# EAGLE board mapleCUx_large_177 (EAGLE 7.3.0)
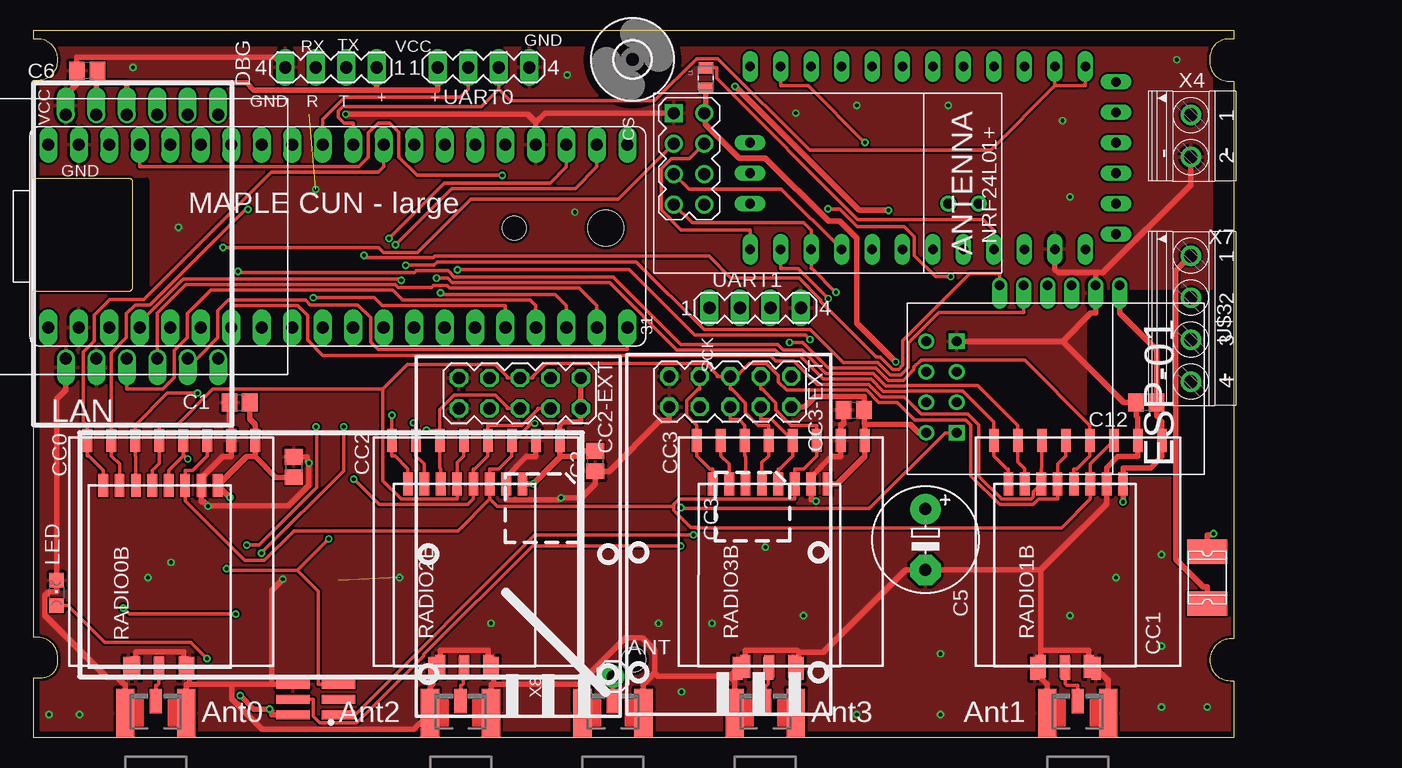
[diagram p0: board, top side]
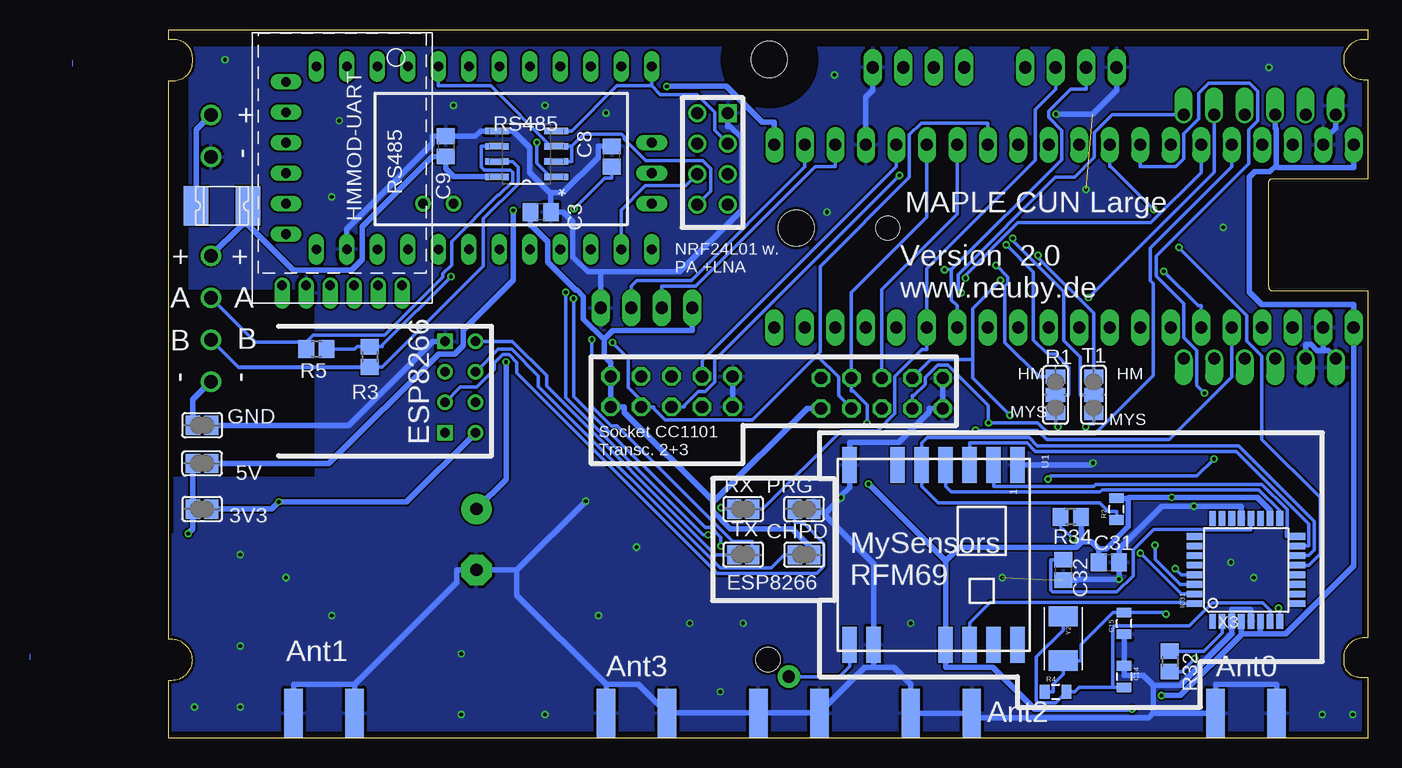
[diagram p1: board, bottom side, seen from below]

Size 100 x 59 mm. Coordinates in mm from the lower left corner, seen from the top.
Outline: 0,0 0,5 0.71,5 arc90 2,6.29 2,6.67 arc90 0.32,8.35 0,8.35 0,37.21 7.89,37.21 arc90 8.26,37.58 8.26,46.32 arc90 7.97,46.61 0,46.61 0,54.83 0.39,54.83 arc90 2,56.44 2,56.57 arc90 0.33,58.24 0,58.24 0,59 100,59 100,58.24 99.54,58.24 arc90 98,56.7 98,56.41 arc90 99.41,54.75 100,54.75 100,8.24 99.8,8.24 arc90 98,6.44 arc90 99.69,4.75 100,4.75 100,0 0,0
Copper layers (1*16): Top 0.035mm / dielectric 1.5mm / Bottom 0.035mm
Design rules "SeeedStudio_2layer_DRU_no_angle_20140221": minimum track width 6mil, minimum drill 12mil, track to track 6mil, track to pad 6mil, pad to pad 6mil, via to via 6mil, smd to smd 0mil, copper to edge 10mil, drill to drill 10mil, minimum pad ring 10mil, minimum via ring 6mil, stop-mask expansion 2mil, vias tented up to drill 100mil, thermal gap 10mil
Net classes: 0 default: width 0.305 mm; 1 PWR: width 0.457 mm
Holes 2 mm at 50,6.5 40.03,42.48
Holes 3 mm at 47.65,42.48
tRestrict: area 0,37.3 to 9.4,46.5; area 1.9,17.1 to 100.3,59.1
bRestrict: area 0,37.3 to 9.4,46.5; area 1.9,17.1 to 100.3,59.1

## Footprints (pad centres in the part's own frame; a part is rotated, then mirrored left to right if it is on the bottom)
SJ = smd 1.168 x 1.6: 1 -0.762,0; 2 0.762,0
1X01 = drill 1.016 pad 1.88: 1 0,0
C0805 = smd 1.3 x 1.5: 1 -0.85,0; 2 0.85,0
E5-8,5 = drill 1.016 pad 2.54: + -2.54,0 | drill 1.016 pad 2.54 octagon: - 2.54,0
0805 = smd 0.8 x 1.2: 1 -0.9,0; 2 0.9,0
CC1101_MODULE1_SMD = smd 1.93 x 0.813: ANT 19,5.96; CSN 0,0; GDO0 0,2; GDO2 0,4; GND@0 0,12; GND@1 19,8.5; GND@2 19,3.42; MISO 0,6; MOSI 0,10; SCLK 0,8; VCC 0,14
CC1101_MODULE3_DIL = drill 1.016 octagon: CSN 1.81,6.1; GDO0 4.35,6.1; GDO2 4.35,8.64; GND@0 1.81,3.56; GND@1 4.35,3.56; MISO 1.81,8.64; MOSI 1.81,11.18; SCK 4.35,11.18; VCC@0 1.81,13.72; VCC@1 4.35,13.72
MA04-1 = drill 1.016 long: 1 -3.81,0; 2 -1.27,0; 3 1.27,0; 4 3.81,0
1812L = smd 2.03 x 3.3: P$1 -2.16,0; P$2 2.16,0
3,0 = hole 3: 0,0
HM-MOD-UART-DIL = drill 0.8 offset: 1 0,12; 2 0,10; 3 0,8; 4 0,6; 5 0,4; 6 0,2
USR-ES1 = drill 1 pad 1.35 offset: 1 -10.16,5.715; 2 -10.16,3.175; 3 -10.16,0.635; 4 -10.16,-1.905; 5 -10.16,-4.445; 6 -10.16,-6.985; 7 10.16,-6.985; 8 10.16,-4.445; 9 10.16,-1.905; 10 10.16,0.635; 11 10.16,3.175; 12 10.16,5.715
TQFP32-08 = smd 1.27 x 0.559: 1 -4.293,2.8; 2 -4.293,2; 3 -4.293,1.2; 4 -4.293,0.4; 5 -4.293,-0.4; 6 -4.293,-1.2; 7 -4.293,-2; 8 -4.293,-2.8; 17 4.293,-2.8; 18 4.293,-2; 19 4.293,-1.2; 20 4.293,-0.4; 21 4.293,0.4; 22 4.293,1.2; 23 4.293,2; 24 4.293,2.8 | smd 0.559 x 1.27: 9 -2.8,-4.293; 10 -2,-4.293; 11 -1.2,-4.293; 12 -0.4,-4.293; 13 0.4,-4.293; 14 1.2,-4.293; 15 2,-4.293; 16 2.8,-4.293; 25 2.8,4.293; 26 2,4.293; 27 1.2,4.293; 28 0.4,4.293; 29 -0.4,4.293; 30 -1.2,4.293; 31 -2,4.293; 32 -2.8,4.293
WE-KI_0805A = smd 0.925 x 1.2: 1 -0.838,0; 2 0.838,0
CHIPLED_0805 = smd 1.2 x 1.2: A 0,-1.05; C 0,1.05
WIRELESS-NRF24L01 = drill 1 square: 1 -12.7,6.35 | drill 1: 2 -10.16,6.35; 3 -12.7,3.81; 4 -10.16,3.81; 5 -12.7,1.27; 6 -10.16,1.27; 7 -12.7,-1.27; 8 -10.16,-1.27
SJ_2 = smd 1.168 x 1.6: 1 -1.524,0; 2 0,0; 3 1.524,0
R0805 = smd 1.3 x 1.5: 1 -0.85,0; 2 0.85,0
CC1101_MODULE1_SMD' = smd 1.93 x 0.813: ANT 14.889,4.381; CSN -0.318,-0.318; GDO0 -0.318,1.048; GDO2 -0.318,2.413; GND@0 -0.318,7.872; GND@1 14.889,6.381; GND@2 14.889,2.381; MISO -0.318,3.777; MOSI -0.318,6.508; SCLK -0.318,5.143; VCC -0.318,9.238
SOIC127P600X175-8N = smd 1.981 x 0.533: 1 -2.464,1.905; 2 -2.464,0.635; 3 -2.464,-0.635; 4 -2.464,-1.905; 5 2.464,-1.905; 6 2.464,-0.635; 7 2.464,0.635; 8 2.464,1.905
RFM69HCW-XXXS2 = smd 3 x 1.2: 3.3V 7.5,1; ANT 7.5,-7; DIO0 7.5,3; DIO1 7.5,5; DIO2 7.5,7; GND_1 7.5,-5; GND_2 -7.5,-7; GND_3 -7.5,7; MISO -7.5,5; MOSI -7.5,3; NSS -7.5,-1; RESET -7.5,-3; SCK -7.5,1
20-DIP = drill 1.016 pad 1.27 long: 1 -24.13,-7.62; 2 -21.59,-7.62; 3 -19.05,-7.62; 4 -16.51,-7.62; 5 -13.97,-7.62; 6 -11.43,-7.62; 7 -8.89,-7.62; 8 -6.35,-7.62; 9 -3.81,-7.62; 10 -1.27,-7.62; 11 1.27,-7.62; 12 3.81,-7.62; 13 6.35,-7.62; 14 8.89,-7.62; 15 11.43,-7.62; 16 13.97,-7.62; 17 16.51,-7.62; 18 19.05,-7.62; 19 21.59,-7.62; 20 24.13,-7.62 | drill 1 pad 1.27 long: 21 24.13,7.62; 22 21.59,7.62; 23 19.05,7.62; 24 16.51,7.62; 25 13.97,7.62; 26 11.43,7.62; 27 8.89,7.62; 28 6.35,7.62; 29 3.81,7.62; 30 1.27,7.62; 31 -1.27,7.62; 32 -3.81,7.62; 33 -6.35,7.62; 34 -8.89,7.62; 35 -11.43,7.62; 36 -13.97,7.62; 37 -16.51,7.62; 38 -19.05,7.62; 39 -21.59,7.62; 40 -24.13,7.62
ABK-PRO-MINI = drill 0.8 long: A0 10.16,-3.81; A1 10.16,-6.35; A2 10.16,-8.89; A3 10.16,-11.43; A6 3.81,-21.59; A7 6.35,-21.59; D2 -5.08,-3.81; D3 -5.08,-6.35; D4 -5.08,-8.89; D5 -5.08,-11.43; D6 -5.08,-13.97; D7 -5.08,-16.51; D8 -5.08,-19.05; D9 -5.08,-21.59; D10 10.16,-21.59; D11 10.16,-19.05; D12 10.16,-16.51; D13 10.16,-13.97; DTR 8.89,8.89; GND 10.16,3.81; GND1 -5.08,-1.27; GND2 -3.81,8.89; GND3 -1.27,8.89; GND4 1.27,-21.59; RAW 10.16,6.35; RST 10.16,1.27; RST1 -5.08,1.27; RX1 -5.08,3.81; RX1-1 3.81,8.89; TX0 -5.08,6.35; TX0-1 6.35,8.89; VCC 10.16,-1.27; VCC1 1.27,8.89 | drill 0.8: A4 6.35,-5.08; A5 6.35,-2.54
ESP01 = drill 0.8: CH_PD -1.285,-8.178; GPIO0 1.255,-5.638; GPIO2 -1.285,-5.638; RST 1.255,-8.178; TX -3.825,-8.178; VCC 3.795,-8.178 | drill 0.8 square: GND -3.825,-5.638; RX 3.795,-5.638
SMA_EDGELAUNCH_UFL = smd 4.064 x 1.524: GND@1 2.032,-2.54; GND@2 2.032,2.54 | smd 4.064 x 1.524 bottom: GND@3 2.032,2.54; GND@4 2.032,-2.54 | smd 2.032 x 1.016: P 3.048,0
1751248 = drill 1.1 pad 1.7: 1 -1.75,-0.1; 2 1.75,-0.1
1751264 = drill 1.1 pad 1.7: 1 -5.25,-0.1; 2 -1.75,-0.1; 3 1.75,-0.1; 4 5.25,-0.1
2X03-1.27MM_SMD = smd 0.75 x 2.8: P$1 -1.27,-1.905; P$2 -1.27,1.905; P$3 0,-1.905; P$4 0,1.905; P$5 1.27,-1.905; P$6 1.27,1.905
CRYSTAL-TXC-7A = smd 1.7 x 2.4: P$1 1.85,0; P$2 -1.85,0

## Placement (x,y rotation side)
3V3  [SJ]  97.16,19.05 180 bottom
5V  [SJ]  97.16,22.86 0 bottom
ANT  MICRO RF  [1X01]  48.26,5.08 0 top
C1  22pF  [C0805]  17.14,27.94 0 top
C2  22pF  [C0805]  46.81,23.05 90 top
C3  22pF  [C0805]  68.94,43.81 180 bottom
C4  22pF  [C0805]  68.33,27.3 0 top
C5  220uF  [E5-8,5]  74.3,16.51 270 top
C6  22pF  [C0805]  4.45,55.61 180 top
C8  220p  [C0805]  63.03,48.45 90 bottom
C9  22p  [C0805]  76.83,49.3 270 bottom
C11  22pF  [C0805]  21.66,22.55 270 top
C12  22pF  [C0805]  92.71,27.94 180 top
C14  30pf  [0805]  20.32,5.08 270 bottom
C15  30pf  [0805]  20.32,9.53 90 bottom
C31  100n  [C0805]  21.59,14.61 0 bottom
C32  100n  [C0805]  25.4,13.97 270 bottom
CC0  CC1101  [CC1101_MODULE1_SMD]  4.45,24.77 270 top
CC1  CC1101_MODULE1SMD  [CC1101_MODULE1_SMD]  80.01,24.77 270 top
CC2  CC1101_MODULE1SMD  [CC1101_MODULE1_SMD]  29.84,24.77 270 top
CC2-EXT  CC1101_MODULE3_DIL  [CC1101_MODULE3_DIL]  31.87,31.79 270 top
CC3  CC1101_MODULE1SMD  [CC1101_MODULE1_SMD]  55.24,24.77 270 top
CC3-EXT  CC1101_MODULE3_DIL  [CC1101_MODULE3_DIL]  49.4,31.93 270 top
CHPD  [SJ]  46.99,15.24 180 bottom
DBG  [MA04-1]  24.77,55.88 180 top
F1  1812L  [1812L]  95.5,44.32 180 bottom
F2  1812L  [1812L]  97.79,13.34 270 top
GND  [SJ]  97.16,26.04 180 bottom
H6  MOUNT-HOLE3.0  [3,0]  49.89,56.55 0 top
HMMOD-UART  HM-MOD-UARTDIL  [HM-MOD-UART-DIL]  78.49,37.72 90 bottom
IC2  LAN-USR-ES1  [USR-ES1]  8.38,41.78 90 top
IC31  ATMEGA168-TQFP  [TQFP32-08]  10.16,13.97 90 bottom
L1  [WE-KI_0805A]  56,55 270 top
LED  [CHIPLED_0805]  1.91,12.06 0 top
NRF24L01+  NRF24L01+  [WIRELESS-NRF24L01]  66.04,45.72 0 top
PRG  [SJ]  46.99,19.05 0 bottom
R1  [SJ_2]  26.04,28.57 90 bottom
R2  10k  [0805]  20.95,19.05 90 bottom
R3  60  [R0805]  83.19,31.75 270 bottom
R4  1M  [0805]  26.04,3.81 0 bottom
R5  60  [R0805]  87.63,32.38 180 bottom
R32  1k  [R0805]  16.51,6.35 270 bottom
R34  [R0805]  24.77,18.41 180 bottom
RADIO0B  CC1101_MODULE1SMALL  [CC1101_MODULE1_SMD']  6.1,20.7 270 top
RADIO1B  CC1101_MODULE1SMALL  [CC1101_MODULE1_SMD']  81.53,20.83 270 top
RADIO2B  CC1101_MODULE1SMALL  [CC1101_MODULE1_SMD']  31.5,20.83 270 top
RADIO3B  CC1101_MODULE1SMALL  [CC1101_MODULE1_SMD']  56.9,20.83 270 top
RS485  MAX487ECSA+  [SOIC127P600X175-8N]  70.12,48.66 180 bottom
RX  [SJ]  52.07,19.05 180 bottom
T1  [SJ_2]  22.86,28.57 90 bottom
TX  [SJ]  52.07,15.24 180 bottom
U1  RFM69HCW  [RFM69HCW-XXXS2]  36.2,15.24 270 bottom
U$1  MAPLEMINI  [20-DIP]  25.34,41.8 0 top
U$2  ABK-PRO-MINI  [ABK-PRO-MINI]  81.28,50.87 270 top
U$3  ESP01  [ESP01]  82.55,29.21 270 top
UART0  [MA04-1]  37.47,55.88 0 top
UART1  [MA04-1]  60.12,35.83 0 top
X1  [SMA_EDGELAUNCH_UFL]  87,0 90 top
X2  [SMA_EDGELAUNCH_UFL]  35.56,0 90 top
X3  [SMA_EDGELAUNCH_UFL]  60.96,0 90 top
X4  1751248  [1751248]  96.52,50.16 270 top
X5  [SMA_EDGELAUNCH_UFL]  10.16,0 90 top
X7  1751264  [1751264]  96.52,34.92 270 top
X8  [SMA_EDGELAUNCH_UFL]  48.26,0 90 top
X31  M03X2  [2X03-1.27MM_SMD]  23.5,3.17 90 top
Y2  8MHZ  [CRYSTAL-TXC-7A]  25.4,8.26 270 bottom

## Library data of the parts
3V3 5V CHPD GND PRG R1 RX T1 TX = jumper
ANT = SparkFun-Connectors
C1-C6 C8 C9 C11 C12 C31 C32 R3 R5 R32 R34 = rcl
C14 C15 R2 R4 U1 = doug
CC0 CC1 CC2 CC2-EXT CC3 CC3-EXT HMMOD-UART = wireless
DBG UART0 UART1 = con-lstb; OC_FARNELL: unknown; OC_NEWARK: unknown
F1 F2 = ptc-littlefuse
H6 = holes
IC2 RADIO0B RADIO1B RADIO2B RADIO3B = Martin-Communication
IC31 = atmel
L1 = EAGLE-EMC_COMPONENTS-rev17a
LED = led
NRF24L01+ = diy-modules
RS485 = Maxim_By_element14_Batch_1; MPN: MAX487ECSA+; OC_FARNELL: 9724532; OC_NEWARK: 68K4803; PACKAGE: SOIC-8; SUPPLIER: Maxim
U$1 = maplemini-small
U$2 = Arduino-clone
U$3 = esp8266modules
X1-X3 X5 X8 = adafruit
X4 = con-phoenix-350; OC_FARNELL: unknown; OC_NEWARK: unknown
X7 = con-phoenix-350; MPN: 1751264; OC_FARNELL: unknown; OC_NEWARK: 10R0934
X31 = mechanics
Y2 = SparkFun-FreqCtrl

## Nets
+5V [PWR]: 5V.2 U$1.21
A: R5.2 RS485.6 X7.2
ANT: ANT.1 U1.ANT X8.P
ANT0: CC0.ANT RADIO0B.ANT X5.P
ANT1: CC1.ANT RADIO1B.ANT X1.P
ANT2: CC2.ANT RADIO2B.ANT X2.P
ANT3: CC3.ANT RADIO3B.ANT X3.P
B: R3.2 RS485.7 X7.3
CC_CS0: CC0.CSN RADIO0B.CSN U$1.29
CC_CS1: CC1.CSN RADIO1B.CSN U$1.35
CC_CS2: CC2-EXT.CSN CC2.CSN RADIO2B.CSN U$1.4
CC_CS3: CC3-EXT.CSN CC3.CSN RADIO3B.CSN U$1.25
CC_IN_0: CC0.GDO2 RADIO0B.GDO2 U$1.33
CC_IN_1: CC1.GDO2 RADIO1B.GDO2 U$1.7
CC_IN_2: CC2-EXT.GDO2 CC2.GDO2 RADIO2B.GDO2 U$1.5
CC_IN_3: CC3-EXT.GDO2 CC3.GDO2 RADIO3B.GDO2 U$1.37
CC_OUT_0: CC0.GDO0 RADIO0B.GDO0 U$1.32
CC_OUT_1: CC1.GDO0 RADIO1B.GDO0 U$1.6
CC_OUT_2: CC2-EXT.GDO0 CC2.GDO0 RADIO2B.GDO0 U$1.36
CC_OUT_3: CC3.GDO0 RADIO3B.GDO0
CE-A: IC31.13 NRF24L01+.3 RS485.4 U$2.D9
CSN-A: NRF24L01+.4 U$2.D10
D2_INT0: IC31.32 U1.DIO0
D10_SS: IC31.14 R2.1 U1.NSS
D11_MOSI: IC31.15 U1.MOSI
D12_MISO: IC31.16 U1.MISO
D13_SCK: IC31.17 U1.SCK
E+ [PWR]: F1.P$2 X4.1
GD [PWR]: GND.2 X7.4
GND [PWR]: C1.1 C2.1 C3.1 C4.1 C5.- C6.2 C8.2 C9.1 C11.1 C12.2 C14.1 C15.1 C31.2 C32.2 CC0.GND@0 CC0.GND@1 CC0.GND@2 CC1.GND@0 CC1.GND@1 CC1.GND@2 CC2-EXT.GND@0 CC2-EXT.GND@1 CC2.GND@0 CC2.GND@1 CC2.GND@2 CC3-EXT.GND@0 CC3-EXT.GND@1 CC3.GND@0 CC3.GND@1 CC3.GND@2 DBG.4 GND.1 HMMOD-UART.2 IC2.1 IC2.2 IC2.12 IC31.3 IC31.5 IC31.21 LED.C NRF24L01+.1 PRG.2 RADIO0B.GND@0 RADIO0B.GND@1 RADIO0B.GND@2 RADIO1B.GND@0 RADIO1B.GND@1 RADIO1B.GND@2 RADIO2B.GND@0 RADIO2B.GND@1 RADIO2B.GND@2 RADIO3B.GND@0 RADIO3B.GND@1 RADIO3B.GND@2 RS485.5 U1.GND_1 U1.GND_2 U1.GND_3 U$1.2 U$1.24 U$1.39 U$2.GND U$3.GND UART0.4 UART1.4 X1.GND@1 X1.GND@2 X1.GND@3 X1.GND@4 X2.GND@1 X2.GND@2 X2.GND@3 X2.GND@4 X3.GND@1 X3.GND@2 X3.GND@3 X3.GND@4 X4.2 X5.GND@1 X5.GND@2 X5.GND@3 X5.GND@4 X8.GND@1 X8.GND@2 X8.GND@3 X8.GND@4 X31.P$6
IRQ-A: NRF24L01+.8 RS485.2 RS485.3 U$2.D2
M-RES: IC31.29 R34.2 X31.P$5
M-SCK: X31.P$3
MISO1: CC0.MISO CC1.MISO CC2-EXT.MISO CC2.MISO CC3-EXT.MISO CC3.MISO RADIO0B.MISO RADIO1B.MISO RADIO2B.MISO RADIO3B.MISO U$1.27
MISO2: IC2.7 U$1.18
MISO-A: NRF24L01+.7 U$2.D12 X31.P$1
MOSI1: CC0.MOSI CC1.MOSI CC2-EXT.MOSI CC2.MOSI CC3-EXT.MOSI CC3.MOSI RADIO0B.MOSI RADIO1B.MOSI RADIO2B.MOSI RADIO3B.MOSI U$1.26
MOSI-A: NRF24L01+.6 U$2.D11 X31.P$4
N$1 [PWR]: C5.+ L1.2 NRF24L01+.2
N$2: L1.1 U$2.VCC
N$3 [PWR]: 3V3.2 5V.1 F2.P$1
N$6: C14.2 IC31.7 R4.2 Y2.P$2
N$8: RX.2 U$3.RX
N$10: TX.2 U$3.TX
N$11: PRG.1 U$3.GPIO0
N$12: CHPD.2 U$3.CH_PD
N$13: C32.1 IC31.20
N$14: U1.DIO2
N$15: U1.DIO1
N$16: U1.RESET
N$18: LED.A R32.2
N$19: C15.2 IC31.8 R4.1 Y2.P$1
N$21: C8.1 R3.1 R5.1
N$33: IC2.6
NRESET: U$1.34
R1-HM: HMMOD-UART.5 R1.3
R1-MY: IC31.31 R1.1
RO-A: RS485.1 U$2.D8
RST: IC2.3 U$1.17
RX1: R1.2 U$1.22 UART1.3
RX-MAPLE: U$1.30 U$2.RX1 U$2.TX0 UART0.3
RX_DBG: DBG.3 TX.1 U$1.14
RX_LED: IC31.2 R32.1
SCK1: CC0.SCLK CC1.SCLK CC2-EXT.SCK CC2.SCLK CC3-EXT.SCK CC3.SCLK RADIO0B.SCLK RADIO1B.SCLK RADIO2B.SCLK RADIO3B.SCLK U$1.28
SCK2: IC2.4 U$1.19
SCK-A: NRF24L01+.5 U$2.D13
SWCLK/TCK: U$1.10
SWDIO/TMS: U$1.11
SWO/TDO: U$1.8
T1-HM: HMMOD-UART.6 T1.3
T1-MY: IC31.30 T1.1
TDI: U$1.9
TX1: T1.2 U$1.23 UART1.2
TX-MAPLE: U$1.31 UART0.2
TX_DBG: DBG.2 RX.1 U$1.15
VCC [PWR]: 3V3.1 C1.2 C2.2 C3.2 C4.2 C6.1 C11.2 C12.1 C31.1 CC0.VCC CC1.VCC CC2-EXT.VCC@0 CC2-EXT.VCC@1 CC2.VCC CC3-EXT.VCC@0 CC3-EXT.VCC@1 CC3.VCC CHPD.1 DBG.1 HMMOD-UART.1 IC2.10 IC2.11 IC31.4 IC31.6 IC31.18 R2.2 R34.1 RADIO0B.VCC RADIO1B.VCC RADIO2B.VCC RADIO3B.VCC U1.3.3V U$1.1 U$1.40 U$3.VCC UART0.1 UART1.1 X31.P$2
VDD [PWR]: C9.2 F1.P$1 F2.P$2 RS485.8 X7.1
WIZ_CS: IC2.5 U$1.20
WIZ_RST: IC2.8 U$1.16

## Tracks (layer width: path | path; a pad name or v marks a point on that pad's centre or on a via)
+5V  (via drill 0.3 pad 0.61)
  Top 0.457: v71.22,43.97 68.77,43.97 v58.44,54.3
  Bottom 0.457: U$1.21 49.47,51.31 50.49,51.31 53.48,54.3 v58.44,54.3 | 5V.2 95.43,22.86 86.58,22.86 77.44,32 76.1,32 75.41,32.69 75.41,33.98 71.22,38.16 v71.22,43.97
A
  Bottom 0.305: 88.48,32.99 87.91,33.55 81.94,33.55 77.1,38.39 77.1,38.68 76.36,39.41 76.36,41.36 72.51,45.21 72.43,45.21 71.29,46.35 71.29,47.15 71.47,47.33 73.64,47.33 73.88,47.57 73.88,49.3 RS485.6 | 88.48,32.99 92.73,32.99 X7.2 | R5.2 88.48,32.99
ANT
  Top 0.305: X8.P ANT.1
  Bottom 0.305: U1.ANT 43.2,5.93 44.05,5.08 ANT.1
ANT0
  Top 0.305: X5.P 10.16,4.37 10.28,4.37 10.4,4.5 CC0.ANT 10.45,5.81 RADIO0B.ANT
ANT1
  Top 0.305: X1.P 87,4.37 86.1,4.37 85.97,4.5 CC1.ANT 85.92,5.82 RADIO1B.ANT
ANT2
  Top 0.305: X2.P 35.56,4.37 35.68,4.37 35.8,4.5 CC2.ANT 35.8,5.87 RADIO2B.ANT
ANT3
  Top 0.305: X3.P 60.96,4.37 61.08,4.37 61.2,4.5 CC3.ANT 61.2,5.87 RADIO3B.ANT
B
  Bottom 0.305: RS485.7 71.29,48.03 70.83,47.57 70.83,46.16 73.73,43.26 73.73,39.3 82.13,30.9 R3.2 94.14,30.9 X7.3
CC_CS0
  Top 0.305: RADIO0B.CSN 5.78,22.29 4.57,23.5 4.45,23.5 CC0.CSN 4.45,24.97 4.45,26.04 4.11,26.37 4.11,32.15 5.02,33.05 5.02,35.22 6.33,36.53 9.17,36.53 19.78,47.15 28.69,47.15 29.15,47.61 U$1.29
CC_CS1  (via drill 0.3 pad 0.61)
  Top 0.305: v33.55,38.31 34.48,38.31 34.86,37.94 47.98,37.94 53.59,32.32 61.8,32.32 62.26,31.87 63.84,31.87 65.8,29.9 69.77,29.9 70.81,28.86 72.83,28.86 72.88,28.92 77.39,28.92 80.01,26.3 CC1.CSN 80.01,23.5 81.09,22.42 81.22,22.42 RADIO1B.CSN
  Bottom 0.305: U$1.35 13.91,47.12 18.11,42.92 29.18,42.92 33.55,38.54 v33.55,38.31
CC_CS2  (via drill 0.3 pad 0.61)
  Top 0.305: U$1.4 8.83,34.59 12.46,38.22 30.52,38.22 v30.62,38.13 | RADIO2B.CSN 31.18,22.42 30.1,23.5 29.84,23.5 CC2.CSN v29.84,26.88
  Bottom 0.305: 32.96,31.53 32.96,29.99 v29.84,26.88 | CC2-EXT.CSN 36.42,31.53 32.96,31.53 | v30.62,38.13 32.96,35.79 32.96,31.53
CC_CS3
  Top 0.305: RADIO3B.CSN 56.58,22.42 56.32,22.42 55.24,23.5 CC3.CSN 55.24,26.04 54.42,26.86 54.42,28.1 55.36,29.05 55.49,29.05 CC3-EXT.CSN
  Bottom 0.305: U$1.25 39.31,47.61 55.49,31.42 CC3-EXT.CSN
CC_IN_0  (via drill 0.3 pad 0.61)
  Top 0.305: v13.63,28.72 11.13,28.72 8.45,26.04 CC0.GDO2 8.45,23.5 8.51,23.43 RADIO0B.GDO2
  Bottom 0.305: v13.63,28.72 14.27,29.35 14.27,32.27 15.34,33.34 15.34,36.17 17.66,38.5 17.66,40.14 9.94,47.87 9.94,50.68 9.2,51.42 9.2,53.88 9.86,54.55 13.29,54.55 14.1,53.74 14.1,51.6 15.34,50.36 15.34,48.27 16.01,47.61 18.99,47.61 U$1.33
CC_IN_1
  Top 0.305: U$1.7 16.45,36.01 22,36.01 22.81,35.2 22.81,33.13 24.08,31.87 61.38,31.87 61.84,31.41 63.33,31.41 65.3,29.44 69.58,29.44 70.62,28.4 72.55,28.4 73.95,27 77.83,27 78.77,26.06 78.77,21.79 80.68,19.88 83.11,19.88 83.29,20.05 83.29,20.49 RADIO1B.GDO2 83.95,22.42 84.01,22.48 CC1.GDO2
CC_IN_2  (via drill 0.3 pad 0.61)
  Top 0.305: 33.84,25.62 v32.72,25.62 | 33.84,25.62 33.84,26.04 33.84,27.37 35.02,28.55 38.44,28.55 39.44,27.55 39.44,27.44 CC2-EXT.GDO2 | 33.84,25.62 CC2.GDO2 33.84,22.48 33.91,22.42 RADIO2B.GDO2
  Bottom 0.305: U$1.5 11.37,30.05 16.58,24.84 26.79,24.84 27.57,25.62 v32.72,25.62
CC_IN_3  (via drill 0.3 pad 0.61)
  Top 0.305: v39.04,46.88 31.95,46.88 30.42,48.41 30.42,50.48 29.66,51.23 28.68,51.23 27.88,50.43 27.88,48.41 27.07,47.61 8.83,47.61 U$1.37 | CC3-EXT.GDO2 58.03,26.51 58.77,26.51 59.24,26.04 CC3.GDO2 59.24,23.5 59.31,23.43 RADIO3B.GDO2
  Bottom 0.305: v39.04,46.88 54.43,31.5 54.43,29.66 55.24,28.84 55.81,28.84 56.97,27.69 56.97,27.57 CC3-EXT.GDO2
CC_OUT_0  (via drill 0.3 pad 0.61)
  Top 0.305: v17.86,44.04 17.63,44.04 9.67,36.08 8.44,36.08 7.72,35.36 7.72,33.34 6.45,32.06 CC0.GDO0 6.45,23.5 7.14,22.8 RADIO0B.GDO0
  Bottom 0.305: U$1.32 21.53,47.61 21.42,47.61 v17.86,44.04
CC_OUT_1  (via drill 0.3 pad 0.61)
  Top 0.305: v17.02,38.86 17.11,38.77 31.7,38.77 31.86,38.92 34.52,38.92 35.05,38.39 48.3,38.39 53.92,32.78 61.99,32.78 62.45,32.32 64.03,32.32 65.99,30.36 69.96,30.36 71,29.32 72.64,29.32 72.69,29.37 78.67,29.37 82.01,26.04 CC1.GDO0 82.01,22.99 82.58,22.42 RADIO1B.GDO0
  Bottom 0.305: v17.02,38.86 14.16,36.01 13.91,36.01 U$1.6
CC_OUT_2  (via drill 0.3 pad 0.61)
  Top 0.305: v31.63,26.24 31.83,26.04 31.84,26.04 CC2.GDO0 31.84,23.5 32.54,22.8 RADIO2B.GDO0
  Bottom 0.305: U$1.36 11.37,47.61 18.15,40.82 18.15,38.09 17.89,37.84 17.89,30.18 22.78,25.3 26.57,25.3 27.52,26.24 v31.63,26.24 31.63,27.7 35,31.07 35.85,31.07 36.9,30.02 36.9,29.44 37.84,28.51 37.97,28.51 CC2-EXT.GDO0
CC_OUT_3
  Top 0.305: CC3.GDO0 57.24,23.5 57.94,22.8 RADIO3B.GDO0
CE-A  (via drill 0.3 pad 0.61)
  Top 0.305: NRF24L01+.3 48.71,44.9 36.41,44.9 31.97,40.46 29.18,40.46 28.77,40.87 v15.76,40.87
  Bottom 0.305: v15.76,40.87 10.1,35.2 10.1,33.05 8.84,31.8 8.84,24.85 4,20.01 4,15.3 4.93,14.37 IC31.13 | RS485.4 66.36,50.57 62.59,54.34 59.69,54.34 | U$2.D9 59.69,54.34 | 59.69,54.34 58.96,53.61 55.9,53.61 54.45,52.16 54.45,50.64 NRF24L01+.3
CSN-A
  Top 0.305: U$2.D10 59.69,42.32 53.97,42.32 52.28,44.01 52.28,47.43 53.11,48.26 54.61,48.26 NRF24L01+.4
D2_INT0
  Bottom 0.305: IC31.32 15.39,11.17 15.48,11.26 31.48,11.26 33.2,9.54 U1.DIO0
D10_SS
  Bottom 0.305: IC31.14 4.93,15.17 4.47,15.63 4.47,18.02 10.78,24.33 27.55,24.33 28.22,25 36.74,25 37.2,24.55 U1.NSS 37.2,20.93 35.8,19.55 22.35,19.55 21.66,18.86 20.95,18.86 R2.1
D11_MOSI
  Bottom 0.305: IC31.15 4.93,15.97 4.93,17.83 10.97,23.87 27.74,23.87 28.41,24.55 33.2,24.55 U1.MOSI
D12_MISO
  Bottom 0.305: IC31.16 6.81,16.77 6.81,17.18 6.75,17.24 6.75,19 8.87,21.12 22.67,21.12 22.86,20.93 31.2,20.93 U1.MISO
D13_SCK
  Bottom 0.305: IC31.17 7.36,18.92 9.1,20.66 22.16,20.66 22.34,20.48 34.74,20.48 35.2,20.93 U1.SCK
E+
  Bottom 0.457: X4.1 97.66,50.67 F1.P$2
GD
  Bottom 0.457: X7.4 97.92,28.18 GND.2
GND  (via drill 0.3 pad 0.61)  (2 unrouted)
  Top 0.457: v65.18,19.71 65.09,19.8 64.77,19.8 RADIO3B.GND@0 64.77,21.73 66.46,23.42 67.25,23.42 CC3.GND@0 67.25,26.11 67.42,26.11 67.48,26.17 C4.1 | 41.85,51.31 41.17,51.98 v26,51.98 | NRF24L01+.1 42.61,52.07 41.85,51.31 | U$1.24 41.85,51.31 | 16.49,4.45 16.49,3.23 19.04,0.69 31.68,0.69 X2.GND@2 33.02,4.17 33.27,4.42 CC2.GND@2 33.44,5.94 RADIO2B.GND@2 33.88,7.29 37.88,7.29 RADIO2B.GND@1 38.17,5.94 CC2.GND@1 38.34,4.45 | X5.GND@2 7.62,4.45 7.55,4.45 6.97,5.03 | 6.97,5.03 6.07,5.03 0.92,10.18 0.92,11.8 1.26,12.13 1.91,12.13 LED.C 1.91,28.22 2.67,28.98 IC2.1 | 6.97,5.03 7.87,5.03 CC0.GND@2 7.91,5.81 RADIO0B.GND@2 8.48,7.16 12.48,7.16 RADIO0B.GND@1 12.48,5.57 12.95,5.11 | CC2.GND@0 41.84,23.42 41.06,23.42 39.37,21.73 RADIO2B.GND@0 39.37,19.8 43.74,19.8 v43.93,19.99 45.63,19.99 46.81,21.16 C2.1 47.94,22.2 52.17,26.43 52.95,26.43 CC3-EXT.GND@1 | 38.34,4.45 38.1,4.45 X2.GND@4 | 45.68,4.45 38.34,4.45 | 45.68,4.45 45.68,4.7 49.28,8.29 50.72,8.29 51.74,7.28 51.74,5.38 | 45.68,4.45 45.68,4.25 45.72,4.21 X8.GND@3 | DBG.4 20.09,56.74 3.6,56.74 C6.2 3.6,55.04 3.6,54.48 2.67,53.55 IC2.12 | C1.1 16.3,26.26 16.45,26.11 CC0.GND@0 16.45,23.42 15.75,23.42 13.97,21.64 RADIO0B.GND@0 13.97,19.67 14.14,19.67 v14.51,19.3 21.21,19.3 22.93,21.02 v22.93,22.9 22.8,23.03 22.8,23.39 C11.1 | 51.74,5.38 50.8,4.45 X8.GND@4 | 58.01,5.11 | 58.01,5.11 52.01,5.11 51.74,5.38 | 58.01,5.11 58.42,4.69 58.42,4.45 X3.GND@2 | 58.01,5.11 CC3.GND@2 59.1,5.76 RADIO3B.GND@2 59.28,7.29 63.57,7.29 63.74,7.11 | 16.49,4.45 12.95,4.45 | 19.81,4.45 16.49,4.45 | 19.81,4.45 19.81,12.28 v20.74,13.21 | 19.81,4.45
  Top 0.457: 85.73,33.03 U$3.GND | 85.73,33.03 90.83,27.94 C12.2 91.86,27.38 91.86,26.81 92.01,26.66 CC1.GND@0 92.01,23.42 90.33,23.42 89.41,22.49 RADIO1B.GND@0 89.41,19.46 83.92,13.97 | 85.73,33.03 88.08,35.38 88.49,35.38 HMMOD-UART.2 88.49,38.24 88.49,38.75 | X4.2 96.42,46.08 89.1,38.75 88.49,38.75 | 88.49,38.75 85.36,38.75 85.09,39.02 U$2.GND | 63.74,5.94 63.74,7.11 | 63.74,5.94 CC3.GND@1 63.74,4.42 63.5,4.17 X3.GND@1 | 63.74,5.94 RADIO3B.GND@1 | X31.P$6 19.81,4.45 | 12.95,5.11 12.95,4.45 | CC0.GND@1 12.95,5.11 | 12.95,4.45 12.7,4.45 X5.GND@1 | X1.GND@1 89.53,4.74 CC1.GND@1 88.34,5.94 RADIO1B.GND@1 87.92,7.29 83.92,7.29 | 83.52,5.76 83.52,5.38 84.45,4.45 X1.GND@2 | 83.52,5.76 83.69,5.94 RADIO1B.GND@2 83.92,7.29 | 83.52,5.76 CC1.GND@2 | 63.74,7.11 65.78,7.11 72.64,13.97 C5.- 83.92,13.97 | 83.92,13.97 83.92,7.29
  Bottom 0.457: X5.GND@2 7.62,4.45 12.7,4.45 X5.GND@1 17.86,2.03 17.89,2.05 | 70.92,13.97 v65.18,19.71 | 70.92,13.97 73.47,13.97 C5.- 75.95,13.97 75.95,12.95 84.45,4.45 | 70.92,13.97 70.92,11.86 63.5,4.45 | DBG.4 20.95,53.98 22.95,51.98 v26,51.98 | 45.3,18.61 45.74,19.05 PRG.2 | 45.3,18.61 41.2,14.5 U1.GND_1 41.2,5.86 | 45.3,18.61 v43.93,19.99 43.93,20.13 43.2,20.86 U1.GND_2 43.2,24.62 39.11,24.62 36.57,27.15 36.57,27.44 CC2-EXT.GND@1 CC2-EXT.GND@0 | 41.2,5.86 39.51,5.86 38.1,4.45 X2.GND@4 X2.GND@2 33.02,1.84 32.83,1.84 32.64,1.65 18.29,1.65 17.89,2.05 | 45.72,2.06 41.92,5.86 41.2,5.86 | 17.89,4.37 15.65,4.37 11.36,8.66 IC31.3 11.36,10.69 9.76,10.69 IC31.5 | 17.89,4.37 18.71,5.2 20.32,5.2 C14.1 C15.1 | 17.89,2.05 17.89,4.37 | X8.GND@3 45.72,2.06 | 50.8,2.06 45.72,2.06 | X8.GND@4 50.8,2.06 | 58.42,2.06 50.8,2.06 | 58.42,2.06 60.8,4.45 63.5,4.45 | X3.GND@2 58.42,2.06 | X3.GND@1 63.5,4.45 | UART0.4 41.27,53.98 41.85,53.4 U$1.24 | X1.GND@1 89.53,4.45 84.45,4.45 | X1.GND@2 84.45,4.45 | C32.2 24.27,13.12 24.18,13.21 v20.74,13.21 20.74,13.47 C31.2 20.74,15.74 17.2,19.28 14.51,19.28 | 63.92,38.84 57.34,38.84 52.2,43.97 52.2,50.01 53.13,50.94 53.34,50.94 NRF24L01+.1 | 63.92,38.84 65.03,38.84 66.26,40.07 66.26,43.01 67.06,43.81 C3.1 68.09,45.43 | 63.92,38.84 63.92,37.73 UART1.4 | IC31.21 10.56,19.28 14.51,19.28 | IC2.2 5.21,32.76 4.74,32.76 4.25,32.27 3.75,32.27 | IC2.12 2.67,50.81 3.75,49.73 U$1.39 | U$1.2 3.75,32.27 | 3.75,32.27 3.32,32.27 IC2.1 | U$2.GND 85.09,42.4 77.97,49.52 77.97,50.15 C9.1 74.38,50.15 73.96,50.57 RS485.5 71.21,50.57 69.84,49.2 69.84,47.09 68.19,45.43 68.09,45.43 | C8.2 64.17,49.3 64.17,48.37 67.1,45.43 68.09,45.43
  Bottom 0.457: CC3-EXT.GND@1 CC3-EXT.GND@0 | U$3.GND 77.95,33.03 84.95,26.04 GND.1 | 14.51,19.28 v14.51,19.3 | U1.GND_3 23.08,22.74 v22.93,22.9
  other vias: 8.26,55.88 12.06,42.55 23.5,45.72 45.09,43.81 44.45,55.24 63.5,52.07 68.58,52.7 76.2,52.7 85.72,51.44 86.36,45.09 95.25,56.52 97.79,2.54 93.98,2.54 93.98,7.62 93.98,7.62 93.98,15.24 86.36,10.16 75.56,1.91 68.58,1.91 75.56,6.99 64.14,10.16 56.52,9.53 52.07,9.53 52.07,9.53 53.98,3.81 38.1,9.53 11.43,14.61 9.53,13.34 1.27,1.91 3.81,1.91 30.48,13.34 60.96,15.88 90.17,13.34
  pour Top: 0.64,57.78 0.64,0.64 99.69,0.64 99.69,21.59 87.63,21.59 87.63,37.47 98.42,37.47 98.42,57.78
  pour Bottom: 0.64,57.78 0.64,0.64 99.69,0.64 99.69,21.59 87.63,21.59 87.63,37.47 98.42,37.47 98.42,57.78
IRQ-A
  Bottom 0.305: RS485.2 66.36,48.03 66.36,49.3 | U$2.D2 77.47,54.34 73.12,54.34 68.08,49.3 RS485.3 66.36,49.3 | 66.36,49.3 65.36,50.3 62.19,50.3 61.98,50.09 61.98,49.88 60.2,48.09 55.42,48.09 54.77,47.45 54.77,45.56 NRF24L01+.8
M-RES  (via drill 0.3 pad 0.61)
  Top 0.305: 21.95,13.93 23.7,12.19 23.7,4.45 X31.P$5 | 21.95,13.93 16.2,13.93 v16.07,14.07 | 21.95,13.93 v24.58,16.56
  Bottom 0.305: v16.07,14.07 15.56,13.57 IC31.29 | R34.2 25.61,17.36 25.38,17.36 v24.58,16.56
MISO1
  Top 0.305: 29.09,29.06 14.91,29.06 11.89,26.04 10.45,26.04 CC0.MISO 10.45,22.86 9.87,22.29 RADIO0B.MISO | 58.03,29.58 59.64,31.19 61.03,31.19 62.05,30.17 62.05,29.66 62.73,28.98 69.39,28.98 70.43,27.95 71.95,27.95 73.4,26.5 77.66,26.5 78.1,26.06 78.1,21.81 80.49,19.42 83.3,19.42 83.76,19.88 | 83.76,19.88 | 83.76,19.88 85.31,19.88 RADIO1B.MISO 85.31,22.8 86.01,23.5 CC1.MISO | 58.03,29.58 58.03,29.05 58.15,29.05 59.3,27.89 59.3,27.1 60.37,26.04 61.24,26.04 CC3.MISO 61.24,23.5 60.67,22.92 RADIO3B.MISO | 58.03,29.58 CC3-EXT.MISO 56.97,30.11 56.97,30.25 56.03,31.19 42.67,31.19 41.58,30.09 41.58,29.98 40.78,29.98 CC2-EXT.MISO 39.44,29.98 39.44,30.11 38.46,31.1 31.13,31.1 29.09,29.06 | 29.09,29.06 29.09,21.4 30.61,19.88 35.27,19.88 RADIO2B.MISO 35.27,22.92 35.84,23.5 CC2.MISO
  Bottom 0.305: U$1.27 34.23,43.64 40.51,37.36 CC2-EXT.MISO
MISO2  (via drill 0.3 pad 0.61)
  Top 0.305: U$1.18 44.39,36.01 43.46,36.94 34.03,36.94 v33.89,37.08
  Bottom 0.305: v33.89,37.08 34.16,37.35 34.16,38.62 26.05,46.73 24.45,46.73 22.8,48.39 22.8,50.45 21.31,51.94 IC2.7
MISO-A  (via drill 0.3 pad 0.61)
  Top 0.305: NRF24L01+.7 54.87,42.92 64.17,42.92 64.77,42.32 U$2.D12 64.77,39.1 64.87,39.1 v66.85,37.12 | X31.P$1 26.77,1.91 41.76,16.89 v54.98,16.89
  Bottom 0.305: v66.85,37.12 66.85,28.36 55.38,16.89 v54.98,16.89
MOSI1  (via drill 0.3 pad 0.61)
  Top 0.305: 53.32,19.26 53.32,18.92 54.73,17.5 55.24,17.5 55.27,17.48 85.64,17.48 88.04,19.88 RADIO1B.MOSI 88.04,22.8 CC1.MOSI | 53.32,19.26 53.32,19.42 53.77,19.88 63.4,19.88 RADIO3B.MOSI 63.4,22.42 64.17,22.42 65.25,23.5 CC3.MOSI 65.25,26.04 63.1,26.04 61.84,27.29 61.84,27.89 60.69,29.05 60.58,29.05 CC3-EXT.MOSI | 38,19.88 38.62,19.26 53.32,19.26 | 38,19.88 35.37,17.24 21.7,17.24 19.2,14.75 17.6,14.75 12.6,19.75 RADIO0B.MOSI 12.6,22.29 13.24,22.29 14.45,23.5 CC0.MOSI | v41.75,26.2 41.47,26.2 40.04,24.77 CC2.MOSI 39.84,23.5 38.77,22.42 38,22.42 RADIO2B.MOSI 38,19.88
  Bottom 0.305: U$1.26 36.77,47.61 36.77,43.4 43.05,37.12 CC2-EXT.MOSI 43.05,28.91 42.92,28.91 41.75,27.74 v41.75,26.2
MOSI-A  (via drill 0.3 pad 0.61)
  Top 0.305: X31.P$4 23.3,3.17 23.3,1.75 23.82,1.23 26.93,1.23 32.51,6.81 32.51,6.92 41.56,15.97 v53.92,15.97 | U$2.D11 62.23,39.1 63.71,39.1 v66.2,36.61
  Bottom 0.305: v66.2,36.61 66.2,28.46 55.24,17.5 54.73,17.5 53.92,16.69 v53.92,15.97 | U$2.D11 62.23,44 60.21,46.02 56.85,46.02 NRF24L01+.6
N$1  (via drill 0.3 pad 0.61)
  Top 0.457: 55.94,52.07 55.94,51.16 58.77,48.33 60.94,48.33 66.22,43.05 67.16,43.05 68.58,41.63 68.58,34.55 v71.82,31.31 | L1.2 56,52.13 55.94,52.07 | NRF24L01+.2 55.94,52.07
  Bottom 0.457: v71.82,31.31 71.82,21.52 C5.+
N$2
  Top 0.305: L1.1 56.91,55.84 56.91,54.97 68.67,43.2 79.13,43.2 80.01,42.32 U$2.VCC
N$3  (via drill 0.3 pad 0.61)
  Top 0.457: F2.P$1 97.79,16.89 98.19,16.89 v98.31,17.01
  Bottom 0.457: v98.31,17.01 97.92,17.4 3V3.2 5V.1
N$4
  Bottom 0: 111.5,6.5 111.5,7
N$5
  Bottom 0: 108,56.5 108,56
N$6
  Bottom 0.305: 21.28,4.18 24.06,4.18 24.43,3.81 R4.2 26.04,2.9 27.47,2.9 27.64,3.08 27.64,6.71 25.4,8.95 Y2.P$2 | 21.28,4.18 21.11,4.18 C14.2 | 21.28,4.18 21.28,9.11 21.06,9.33 14.89,9.33 12.98,11.24 8.79,11.24 8.16,10.62 IC31.7
N$8  (via drill 0.3 pad 0.61)
  Top 0.305: v53.93,19.17 54.01,19.09 69.62,19.09 75.95,25.41 U$3.RX
  Bottom 0.305: v53.93,19.17 53.84,19.17 53.72,19.05 RX.2
N$9
  Bottom 0.305: 94.11,30.86 83.19,30.86 83.19,30.99
N$10
  Bottom 0.305: U$3.TX 71.3,33.03 68.45,30.18 68.45,29.29 54.4,15.24 TX.2
N$11
  Bottom 0.305: PRG.1 47.75,17.95 47.08,17.95 45.34,16.2 45.34,14.27 45.93,13.68 54.21,13.68 70.93,30.39 70.93,31.28 71.57,31.92 72.1,31.92 72.8,31.22 72.8,30.7 74.27,29.23 75.64,29.23 U$3.GPIO0
N$12
  Bottom 0.305: U$3.CH_PD 72.49,32.38 71.36,32.38 69.14,30.16 69.14,29.29 53.99,14.13 49.75,14.13 48.64,15.24 CHPD.2
N$13
  Bottom 0.305: C32.1 26.45,14.82 26.45,12.32 26.28,12.14 20.94,12.14 19.58,13.5 19.58,15.64 17.85,17.36 13.55,17.36 13.51,17.32 9.76,17.32 IC31.20
N$18  (via drill 0.3 pad 0.61)
  Top 0.305: v14.43,6.58 13.09,7.92 5.9,7.92 2.81,11.02 LED.A
  Bottom 0.305: v14.43,6.58 15.46,5.56 15.46,5.5 R32.2
N$19  (via drill 0.3 pad 0.61)
  Top 0.305: v16.83,10.29 7.96,10.29 v7.46,10.8
  Bottom 0.305: R4.1 26.23,3.81 26.23,4.42 25.4,5.25 Y2.P$1 23.89,6.41 23.89,7.75 21.23,10.43 20.77,10.43 C15.2 16.96,10.43 v16.83,10.29 | IC31.8 7.36,10.62 7.46,10.71 v7.46,10.8
N$21  (via drill 0.3 pad 0.61)
  Top 0.305: v76.41,38.43 75.14,38.43 73.37,40.21 73.37,41.79 72.54,42.61 68.61,42.61 67.16,44.07 v66.17,44.07
  Bottom 0.305: v76.41,38.43 82.13,32.71 82.13,32.6 R3.1 84.24,32.6 84.45,32.38 R5.1 | C8.1 63.03,46.65 63.59,46.65 v66.17,44.07
R1-HM  (via drill 0.3 pad 0.61)
  Top 0.305: v31,39.38 33.33,39.38 33.6,39.66 50.21,39.66 55.86,34 64.72,34 67.45,31.27 70.33,31.27 71.38,30.23 72.26,30.23 72.89,30.86 72.89,32.91 75.43,35.45 82.49,35.45 HMMOD-UART.5
  Bottom 0.305: R1.3 27.41,30.1 30.25,32.94 30.25,37.63 30.01,37.87 30.01,38.39 v31,39.38
R1-MY  (via drill 0.3 pad 0.61)
  Top 0.305: v25.83,25.91 25.83,22.24 v18.97,15.38
  Bottom 0.305: v25.83,25.91 25.83,25.96 26.04,26.16 R1.1 | v18.97,15.38 15.56,11.97 IC31.31
RO-A  (via drill 0.3 pad 0.61)
  Top 0.305: U$2.D8 62.23,54.34 64.54,54.34 v69.26,49.62
  Bottom 0.305: v69.26,49.62 69.26,47.88 68.14,46.76 RS485.1
RST
  Top 0.305: IC2.3 7.75,29.06 10.74,29.06 11.72,30.04 11.72,32.26 12.8,33.34 12.8,35.37 14.73,37.3 29.91,37.3 30.75,36.47 41.39,36.47 41.85,36.01 U$1.17
RX1  (via drill 0.3 pad 0.61)
  Top 0.305: v30.14,41.09 34.84,45.78 45.1,45.78 46.93,47.61 U$1.22
  Bottom 0.305: v30.14,41.09 27.88,38.83 27.88,33.15 26.7,31.98 26.04,31.98 24.93,30.87 24.93,28.57 R1.2 | U$1.22 46.93,47.61 56.42,38.12 60.93,38.12 61.38,37.66 UART1.3
RX-MAPLE
  Top 0.305: 38.73,54.05 37.27,52.59 25.74,52.59 25.39,52.23 25.39,51.73 25.88,51.23 26.61,51.23 U$1.30 | 85.09,54.34 79.73,48.97 64.64,48.97 57,56.61 55.24,56.61 51.71,53.09 39.7,53.09 38.73,54.05 | 85.09,54.34 85.09,54.45 U$2.RX1 | U$2.TX0 87.63,54.34 85.09,54.34 | UART0.3 38.73,54.05
RX_DBG  (via drill 0.3 pad 0.61)
  Top 0.305: v64.68,33.18 64.32,33.54 55.09,33.54 49.63,39.01 v35.3,39.01
  Bottom 0.305: v64.68,33.18 64.68,27.61 63.05,25.98 62.56,25.98 52.93,16.34 51.31,16.34 TX.1 | 34.71,39.01 25.51,48.21 25.51,50.62 26.61,51.72 26.61,52.23 24.79,54.05 23.5,54.05 DBG.3 | v35.3,39.01 34.71,39.01 | 34.71,39.01 34.71,36.49 34.23,36.01 U$1.14
RX_LED
  Bottom 0.305: IC31.2 12.16,8.74 13.7,7.2 R32.1
SCK1  (via drill 0.3 pad 0.61)
  Top 0.305: v62.97,32.93 64.06,32.93 66.18,30.82 70.15,30.82 71.19,29.78 72.45,29.78 73.35,30.67 73.35,30.89 73.94,31.49 82.56,31.49 88.01,26.04 CC1.SCLK 88.01,23.5 86.93,22.42 86.68,22.42 RADIO1B.SCLK | v26.66,21.55 28.8,19.42 36.18,19.42 36.64,19.88 RADIO2B.SCLK 36.64,21.78 36.64,22.42 36.77,22.42 37.84,23.5 CC2.SCLK 37.84,26.04 40.67,26.04 41.98,27.35 41.98,27.44 CC2-EXT.SCK | v12.82,23.23 12.56,23.5 12.45,23.5 | RADIO0B.SCLK 11.24,22.29 | 11.24,22.29 | 11.24,22.29 12.45,23.5 | CC0.SCLK 12.45,23.5 | RADIO3B.SCLK 62.04,22.42 62.17,22.42 63.24,23.5 CC3.SCLK 61.5,26.51 60.58,26.51 CC3-EXT.SCK
  Bottom 0.305: 45.92,31.86 45.66,32.13 45.66,39.29 38.21,46.73 38.21,50.26 37.24,51.23 31.69,51.23 U$1.28 | 60.04,27.57 61.64,29.18 61.64,31.61 v62.97,32.93 | v12.82,23.23 14.26,21.8 26.42,21.8 v26.66,21.55 | 60.04,27.57 59.51,27.57 59.51,27.44 58.55,26.48 51.3,26.48 45.92,31.86 | CC3-EXT.SCK 60.04,27.57 | CC2-EXT.SCK 44.12,28.51 44.12,30.06 45.92,31.86
SCK2
  Top 0.305: IC2.4 10.29,35.4 12.65,37.76 30.12,37.76 30.36,37.52 33.1,37.52 33.29,37.7 34.45,37.7 34.67,37.48 45.45,37.48 46.93,36.01 U$1.19
SCK-A
  Top 0.305: U$2.D13 62.3,45.72 54.61,45.72 NRF24L01+.5
T1-HM  (via drill 0.3 pad 0.61)
  Top 0.305: v27.51,40.21 27.72,40 33.3,40 33.42,40.13 56.28,40.13 58.09,38.31 63.77,38.31 65.59,36.5 65.59,36.36 70.21,31.73 70.53,31.73 71.56,30.69 72.07,30.69 72.43,31.06 72.43,33.1 78.01,38.68 80.49,38.68 HMMOD-UART.6
  Bottom 0.305: T1.3 22.86,35.39 27.51,40.04 v27.51,40.21
T1-MY  (via drill 0.3 pad 0.61)
  Top 0.305: v23.52,25.91 23.58,25.85 23.58,20.86 18.77,16.05 v17.74,16.05
  Bottom 0.305: v17.74,16.05 17.74,14.88 15.63,12.77 IC31.30 | T1.1 22.86,26.16 23.27,26.16 v23.52,25.91
TX1  (via drill 0.3 pad 0.61)
  Top 0.305: v29.6,41.63 34.22,46.24 43.02,46.24 44.39,47.61 U$1.23
  Bottom 0.305: v29.6,41.63 29.6,41.44 25.34,37.17 25.34,33.1 23.96,31.73 23.96,28.57 T1.2 | U$1.23 44.39,47.61 46.07,47.61 56.01,37.66 58.84,37.66 UART1.2
TX-MAPLE
  Top 0.305: U$1.31 24.07,51.56 25.9,53.39 35.53,53.39 36.2,54.05 UART0.2
TX_DBG
  Bottom 0.305: RX.1 50.42,19.05 43.9,25.57 40.87,25.57 39.44,27 39.44,30.1 37.19,32.35 36.77,32.35 U$1.15 36.77,39.12 27.73,48.16 27.73,52.36 26.04,54.05 DBG.2
VCC  (via drill 0.3 pad 0.61)
  Top 0.457: v16.35,20.02 16.33,20.02 RADIO0B.VCC 17.73,23.42 18.45,23.42 | CC3-EXT.VCC@1 64.26,27.57 65.12,28.44 69.18,28.44 C4.2 69.18,26.17 69.25,26.11 | 69.25,26.11 73.03,26.11 73.73,25.41 U$3.VCC | v17.2,3.51 18.34,2.37 v19.65,2.37 19.81,2.21 19.81,1.91 X31.P$2 | 69.25,26.11 CC3.VCC 69.25,23.42 66.97,21.14 RADIO3B.VCC | 43.84,23.42 43.84,23.37 v41.62,21.14 RADIO2B.VCC | 43.84,23.42 45.2,23.42 45.67,23.89 C2.2 | 43.84,23.42 CC2.VCC 43.84,26.11 44.03,26.3 45.59,26.3 CC2-EXT.VCC@1 CC2-EXT.VCC@0 | UART0.1 33.66,53.98 28.57,53.98 | 7.75,54.59 17.73,54.59 18.34,53.98 28.57,53.98 | IC2.10 7.75,54.59 | DBG.1 28.57,53.98 | 7.75,54.59 5.29,54.59 | 18.45,23.42 20.17,21.7 C11.2 | 18.45,23.42 CC0.VCC 18.45,26.11 18,26.56 C1.2 | v90.77,19.64 RADIO1B.VCC 90.77,22.49 93.08,22.49 94.01,23.42 CC1.VCC 94.01,26.36 93.56,26.81 C12.1 93.56,32.3 90.49,35.38 HMMOD-UART.1 | 5.29,54.59 5.21,54.59 IC2.11 | 5.29,54.59 C6.1
  Bottom 0.457: 23.86,16.3 24.29,15.86 34.05,15.86 35.2,14.72 | 23.86,16.3 23.86,17.22 23.91,17.28 R34.1 | 23.86,16.3 23,16.3 22.44,15.74 | 19.97,19.95 19.97,17.59 21.82,15.74 22.44,15.74 | 19.97,19.95 20.13,19.95 R2.2 | v16.35,20.02 19.91,20.02 19.97,19.95 | v16.35,20.02 9.25,20.02 8.16,18.93 IC31.18 | v16.35,20.02 | C31.1 22.44,15.74 | 54.62,19.75 61.97,27.11 61.97,27.57 CC3-EXT.VCC@1 CC3-EXT.VCC@0 63.12,31.26 63.65,31.8 63.65,33.22 | 54.62,19.75 54.62,18.88 53.15,17.41 48,17.41 46.23,15.64 CHPD.1 | 54.62,19.75 54.42,19.75 46.73,27.44 CC2-EXT.VCC@1 | 7.65,47.68 8.17,47.17 9.44,47.17 9.89,46.71 9.89,37.13 8.85,36.08 1.21,36.08 U$1.1 1.21,14.3 6.85,8.66 8.96,8.66 | 7.65,47.68 7.5,47.53 1.21,47.53 U$1.40 | 7.65,47.68 7.65,50.71 7.75,50.81 IC2.10 | 10.56,8.66 8.96,8.66 | v17.2,3.51 15.63,3.51 10.56,8.58 10.56,8.66 | IC31.6 8.96,8.66 | 63.65,33.22 62.95,33.92 56.3,33.92 UART1.1 | 63.65,33.22 63.7,33.22 65.39,34.91 65.39,36.77 65.91,37.3 66.01,37.3 68.36,39.65 68.36,41.36 69.69,42.68 69.8,42.68 C3.2 | 35.2,14.72 v41.62,21.14 | 35.2,14.72 35.2,9.47 U1.3.3V 35.2,5.86 31.26,5.86 27.77,2.37 v19.65,2.37 | IC31.4 10.56,8.66 | U$3.VCC 80.14,19.64 v90.77,19.64 91.37,19.05 3V3.1
VDD
  Top 0.457: F2.P$2 97.79,12.57 97.44,12.57 95.18,14.84 95.18,38.93 X7.1
  Bottom 0.457: 93.34,42.77 93.82,42.77 X7.1 | RS485.8 76.18,46.76 76.83,47.42 C9.2 77.97,48.45 83.82,42.6 83.82,39.86 84.69,38.99 89.56,38.99 93.34,42.77 | 93.34,42.77 F1.P$1
WIZ_CS
  Top 0.305: IC2.5 13.62,31.62 15.34,33.34 15.34,35.61 16.2,36.47 22.64,36.47 23.04,36.07 27.02,36.07 28.08,35.01 28.08,32.98 28.7,32.35 49.47,32.35 U$1.20
WIZ_RST  (via drill 0.3 pad 0.61)
  Top 0.305: v23.29,36.68 28.36,36.68 29.03,36.01 39.31,36.01 U$1.16
  Bottom 0.305: IC2.8 12.83,47.15 v23.29,36.68

## Text on the board
tNames: GND | RX | TX | VCC | GND | R | T | + | + | CS | VCC | - | - | GND | MAPLE CUN - large | 31 | - | SCK | - | LAN | CC3 | Ant0 | Ant2 | Ant3 | Ant1
bNames: RS485 | + | + | - | MAPLE CUN Large | NRF24L01 w. / PA +LNA | + | + | A | Version 2.0 / www.neuby.de | A | ESP8266 | B | B | HM | HM | - | - | MYS | MYS | Socket CC1101 / Transc. 2+3 | MySensors / RFM69 | ESP8266 | Ant1 | Ant0 | Ant3 | Ant2